# Altium PCB USB_to_UART.PcbDoc
Units mil, origin at the board's own origin, x right, y up, seen from the top; angles counter-clockwise.
Board outline 1500 x 625 mil, 2 copper layers (Top Layer, Bottom Layer), stack 61.8 mil thick; 10 components, 9 nets, 54 pads, 17 vias.
Unrouted connection lines stored in the file: 5.
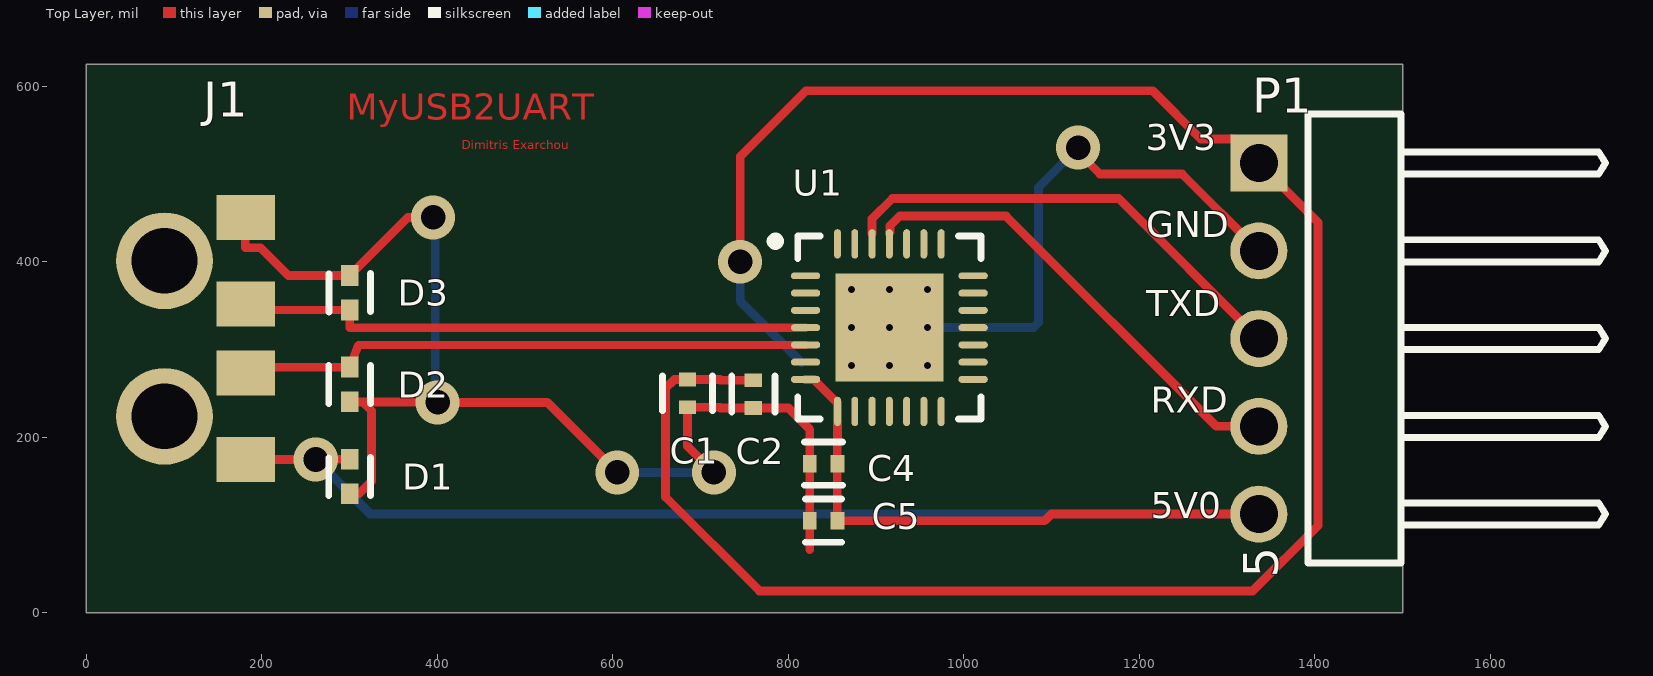
[diagram p0: Top Layer view]
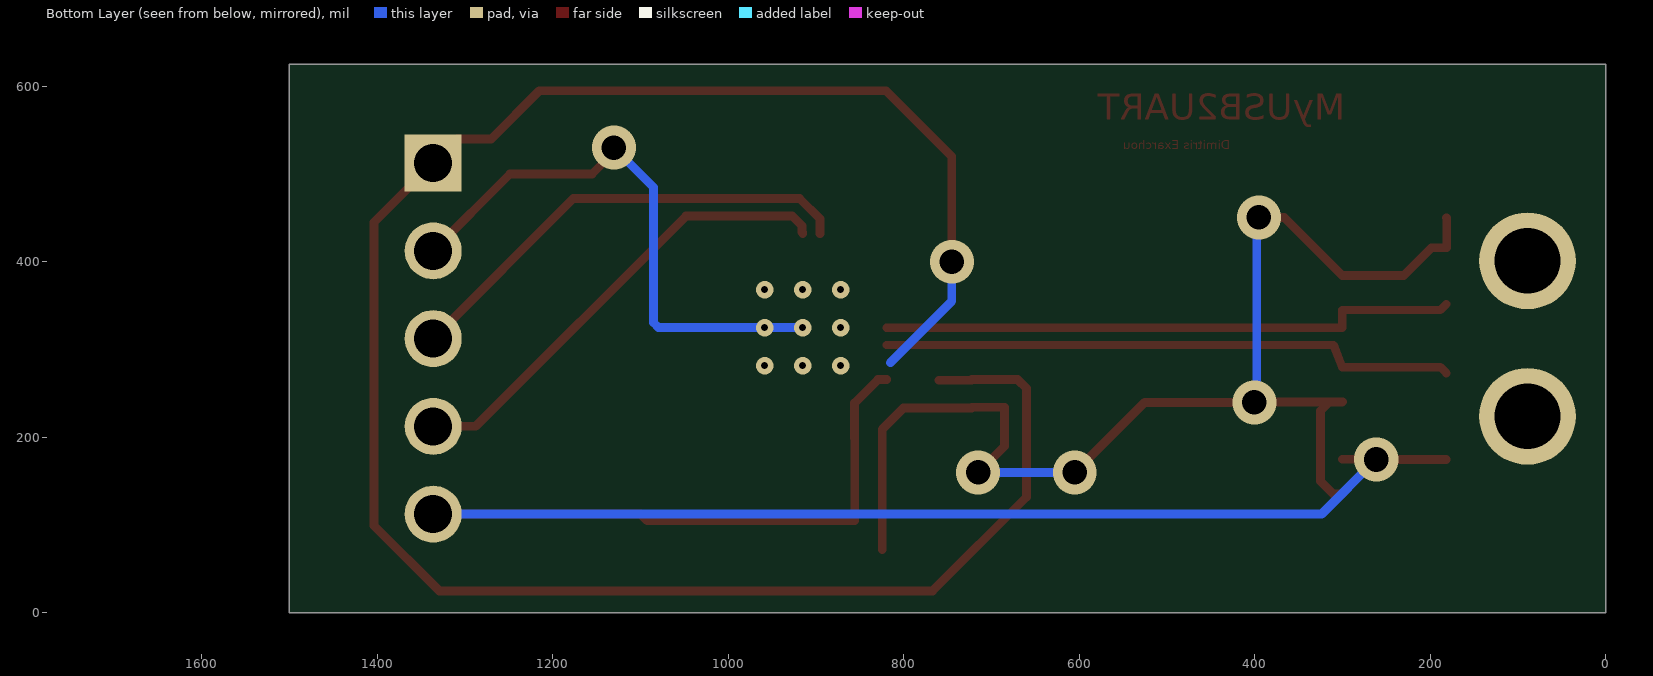
[diagram p1: Bottom Layer view, seen from below]
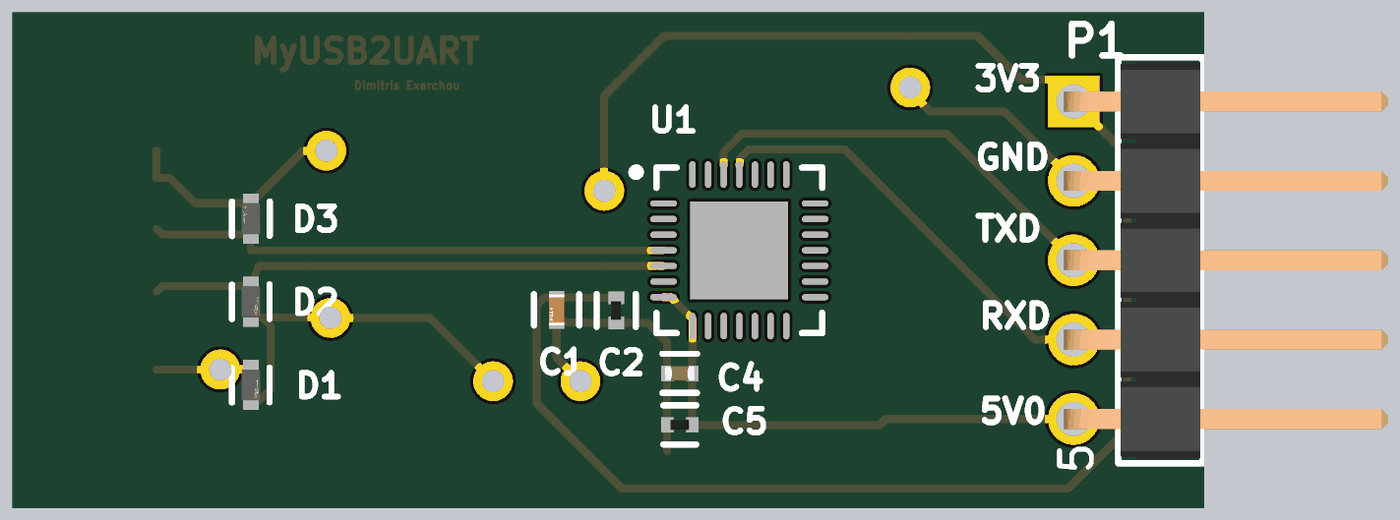
[diagram p2: 3D render of the assembled board from above, using the file's embedded part models]

## Layer stack, top to bottom
Top Solder: solder mask 0.4, Solder Resist, Dk 3.5
Top Layer: signal copper 1.4
Dielectric 1: dielectric 59, FR-4, Dk 4.8
Bottom Layer: signal copper 1.4
Bottom Solder: solder mask 0.4, Solder Resist, Dk 3.5

## Board outline
0,0 0,625 1500,625 1500,0

## Design rules (kind name [scope] priority, off if disabled: settings)
Clearance [All] p1: gap=10 ignorepadtopadclearanceinfootprint=FALSE except(0: Arc-Hole Track-Hole SMDPad-Hole THPad-Hole Via-Hole Fill-Hole Poly-Hole Region-Hole Text-Hole)
DiffPairsRouting [InDifferentialPair('DATA')] p1: maxlimit=5 minlimit=5 mostfreqgap=5 toplayer_minwidth=9.44 toplayer_maxwidth=9.44 toplayer_prefwidth=9.44 bottomlayer_minwidth=9.44 bottomlayer_maxwidth=9.44 bottomlayer_prefwidth=9.44 impedanceprofiledriven=TRUE impedanceprofileid={99593C97-5ADA-46A5-B131-CD178615C1B9} impedanceprofilevalue=90.000000 maxuncoupledlength=500
PolygonConnect [All] p1: connectstyle=Relief reliefconductorwidth=10 reliefentries=4 polygonreliefangle="90 Angle" airgapwidth=10
RoutingVias [All] p1: holewidth=28 width=50 viastyle="Through Hole" minholewidth=28 minwidth=50 maxholewidth=28 maxwidth=50
SolderMaskExpansion [All] p1: expansion=4 istentingtop=FALSE
Width [All] p1: maxlimit=10 minlimit=10 preferedwidth=10
29 further rules are at their usual default settings.

## Classes and differential pairs
component class USB_to_UART: C1 C2 C4 C5 D1 D2 D3 J1 P1
differential pair DATA: +DATA_P -DATA_N

## Components (designator, comment, footprint, x,y, rotation, side; value= is the part's Value field where it differs from the comment)
C1 "C1005X5R1A475K050BC" FP-C1005-050-0_15-MFG 685,250 r270 top
C2 "GRM155R71C104KA88D" FP-GRM15-MFG 760,249.25 r90 top value=0.10μF
C4 "GRM155R61A105KE15D" FP-GRM15-0_1-MFG 840,170 r0 top value=1uF
C5 "GRM155R71C104KA88D" FP-GRM15-MFG 840,105 r180 top value=0.10μF
D1 "TPD1E10B06DPYR" FP-DPY0002A-MFG 300,155.32 r90 top
D2 "TPD1E10B06DPYR" FP-DPY0002A-MFG 300,260.32 r90 top
D3 "TPD1E10B06DPYR" FP-DPY0002A-MFG 300,364.68 r270 top
J1 "629004113921" 629004113921 -220,312.5 r270 top
P1 "61300511021" 61300511021 1445,312.5 r90 top
U1 "CP2102-GM" SLAB-QFN-28-3125x3125TP_N 915,325 r0 top

## Footprints (in the part's own frame and the unit in brackets; to place one, negate y for a bottom-side part, rotate by r counter-clockwise, add the part's x,y. Pads: shape width x height; smd on the part's side, far side on the other; paste and mask are expansions set on the pad)
61300511021 [mm] "Pin Header, pitch 2.54 mm, THT, Angled, single row, 5p"
  rect 1.65x1.65 hole 1.1: 1(5.08,2.77)
  round 1.65 hole 1.1: 2(2.54,2.77) 3(0,2.77) 4(-2.54,2.77) 5(-5.08,2.77)
  silkscreen extent -6.5,-7.27 6.5,1.34, body extent -6.35,-7.27 6.35,3.09, height 2.58
629004113921 [mm] "USB 2.0 Plug Type A SMT with Clip"
  rect 1.3x1.7 smd: 1(3.5,10.2) 2(1,10.2) 3(-1,10.2) 4(-3.5,10.2)
  round 2.8 hole 1.9: ""(-2.25,7.85) ""(2.25,7.85)
  body extent -6,-9.4 6,10.4, height 2.25
FP-C1005-050-0_15-MFG [mm]
  rect 0.4x0.5 smd paste+0 mask+0: 1(-0.4,0) 2(0.4,0)
  silkscreen extent -0.5,-0.73 0.5,0.73, body extent -0.7,-0.43 0.7,0.43, height 0.25
FP-DPY0002A-MFG [mm]
  rect 0.6x0.5 smd paste+0 mask+0: 1(-0.5,0) 2(0.5,0)
  silkscreen extent -0.56,-0.6 0.55,0.6, body extent -0.9,-0.45 0.9,0.45, height 0.25
FP-GRM15-0_1-MFG [mm]
  rect 0.4x0.5 smd paste+0 mask+0: 1(-0.4,0) 2(0.4,0)
  silkscreen extent -0.55,-0.62 0.55,0.62, body extent -0.7,-0.38 0.7,0.38, height 0.25
FP-GRM15-MFG [mm]
  rect 0.4x0.5 smd paste+0 mask+0: 1(-0.4,0) 2(0.4,0)
  silkscreen extent -0.53,-0.62 0.53,0.62, body extent -0.7,-0.38 0.7,0.38, height 0.25
SLAB-QFN-28-3125x3125TP_N [mm] "QFN, 28-Leads, Body 5x5mm, Pitch 0.5mm, Thermal Pad 3.13x3.13mm, IPC Medium Density"
  oval 0.85x0.2 smd: 1(-2.425,1.5) 2(-2.425,1) 3(-2.425,0.5) 4(-2.425,0) 5(-2.425,-0.5) 6(-2.425,-1) 7(-2.425,-1.5) 15(2.425,-1.5) 16(2.425,-1) 17(2.425,-0.5) 18(2.425,0) 19(2.425,0.5) 20(2.425,1) 21(2.425,1.5)
  oval 0.2x0.85 smd: 8(-1.5,-2.425) 9(-1,-2.425) 10(-0.5,-2.425) 11(0,-2.425) 12(0.5,-2.425) 13(1,-2.425) 14(1.5,-2.425) 22(1.5,2.425) 23(1,2.425) 24(0.5,2.425) 25(0,2.425) 26(-0.5,2.425) 27(-1,2.425) 28(-1.5,2.425)
  rect 3.13x3.13 smd: 29(0,0)
  silkscreen extent -3.42,-2.65 2.65,2.65, body extent -2.5,-2.5 2.5,2.5, height 1

## Part data
C1: library part CMP-2000-05997-2, "CAP CER 4.7UF 10V X5R 0402", Capacitance=4.7uF, Case Code (Imperial)=0402, Case Code (Metric)=1005, Dielectric=X5R, Dielectric Material=Ceramic, Max Operating Temperature=85°C, Min Operating Temperature=-55°C, Package Quantity=10000, Tolerance=10%, Voltage Rating=10V, Case/Package=0402, Lead Free="Lead Free", Length=0.039inch, Mount="Surface Mount", Packaging="Cut Tape", REACH SVHC="No SVHC", RoHS Compliant=Yes, Series=C, Thickness=0.022inch, Voltage Rating (DC)=10V, Width=0.02inch
C2 C5: library part CMP-2100-03641-2, "CAP CER 0.1UF 16V X7R 0402", Capacitance=0.10μF, Manufacturer=Murata, Package=GRM15, Temperature="-55°C to +125°C", Temperature Characteristic=X7R, Temperature Range High=+125°C, Temperature Range Low=-55°C, Tolerance=10%, Voltage Rating=16Vdc, Category=Cap, ComponentLink2Description=Datasheet, ComponentLink2URL=https://search.murata.co.jp/Ceramy/image/img/A01X/G101/ENG/GRM155R71H471KA01-01A.pdf, Device Class L1="Passive Components", Device Class L2=Capacitors, Device Class L3="Ceramic Capacitors", Digikey Description="CAP CER 0.1UF 16V X7R 0402", Height=0.55mm, Ipc Land Pattern Name=CAPC10050X219, Lead Free=yes, Manufacturer Part Number=GRM155R71C104KA88D, Material=Ceramic, Mouser Description="0402 0.1 uF 16V ±10 % Tolerance X7R SMT Multilayer Ceramic Capacitor", Octopart=https://octopart.com/grm155r71c104ka88d-murata-196880, RoHS=TRUE, Standoff Height=0mm
C4: library part CMP-2008-04556-2, "CAP CER 1UF 10V X5R 0402", Capacitance=1uF, Manufacturer=Murata, Package=GRM15-0.1, Temperature="-55°C to +85°C", Temperature Characteristic=X5R, Temperature Coefficient=15%, Temperature Range High=+85°C, Temperature Range Low=-55°C, Tolerance=10%, Voltage Rating=10V, Automotive=No, Category=Cap, ComponentLink2Description=Datasheet, ComponentLink2URL=https://search.murata.co.jp/Ceramy/image/img/A01X/G101/ENG/GRM155R61A105KE15-01A.pdf, Device Class L1="Passive Components", Device Class L2=Capacitors, Device Class L3="Ceramic Capacitors", Digikey Description="CAP CER 1UF 10V X5R 0402", Height=0.55mm, Ipc Land Pattern Name=CAPC10050X50, Lead Free=Yes, Manufacturer Part Number=GRM155R61A105KE15D, Material=Ceramic, Mouser Description="0402 1 uF 10 V ±10% Tolerance X5R Surface Mount Multilayer Ceramic Capacitor", Octopart=https://octopart.com/grm155r61a105ke15d-murata-197442, RoHS=TRUE
D1 D2 D3: library part CMP-0326-00004-4, "TVS DIODE 5.5V 14V 2X1SON", Breakdown Voltage=6V, Capacitance=12pF, Case/Package=0402, Clamping Voltage=14V, Leakage Current=100nA, Max Operating Temperature=125°C, Min Operating Temperature=-40°C, Package Quantity=1, Peak Pulse Current=5A, Peak Pulse Power=90W, Power Line Protection=No, Reverse Standoff Voltage=5.5V, Test Current=1mA, Composition=Zener, Contact Plating=Gold, Direction=Bidirectional, Element Configuration=Single, ESD Protection=Yes, Height=0.35mm, Interface=GPIO, Lead Free="Lead Free", Length=1.1mm, Max Reverse Leakage Current=100nA, Min Breakdown Voltage=6V, Number of Bidirectional Channels=1, Number of Channels=1, Number of Pins=2, Packaging="Tape and Reel", Radiation Hardening=No, REACH SVHC="No SVHC", Width=0.7mm, Working Voltage=5.5V
J1: library part CMP-1502-03242-1, "USB 2.0 Type A Plug WR-COM, Horizontal, SMT, with Clips", Contact Resistance=20mOhm, Manufacturer="Wurth Elektronik", Operating Temperature=-40to105degC, Rated Current=1.5A, Working Voltage=30VAC, Connector Type=USB2.0TypeA, Datasheet URL=https://katalog.we-online.de/em/datasheet/629004113921.pdf, Gender=Plug, Manufacturer URL=http://www.we-online.de, Mounting Technology=SMT, Orientation=Horizontal, Package Reference=629004113921, Packaging=Tube, Part Number=629004113921, Publisher=WurthElektronik
P1: library part CMP-1502-01067-1, "THT Angled Pin Header WR-PHD, Pitch 2.54 mm, Single Row, 5 pins", Contact Resistance=20mOhm, Manufacturer="Wurth Elektronik", Operating Temperature=-40to105degC, Rated Current=3A, Withstanding Voltage=500VAC, Working Voltage=250VAC, Datasheet URL=https://katalog.we-online.de/em/datasheet/6130xx11021.pdf, Gender=Male, Manufacturer URL=http://www.we-online.de, Mounting Technology=THT, Orientation=Angled, Package Reference=61300511021, Packaging=Bag, Part Number=61300511021, Pin Number=5, Pitch=2.54mm, Publisher=WurthElektronik, Row Number=Single
U1: library part CMP-0511-00012-1, "Single-Chip USB to UART Bridge, 1024 Bytes EEPROM, -40 to 85 degC, 28-pin QFN, Tube", Manufacturer="Silicon Labs", Code_IPC=J-STD-020C, Code_JEDEC=MO-220, ComponentLink1Description="Manufacturer URL", ComponentLink1URL=http://www.silabs.com/, ComponentLink2Description=Datasheet, ComponentLink2URL=http://www.silabs.com/Support%20Documents/TechnicalDocs/CP2102-9.pdf, ComponentLink3Description="Package Specification", ComponentLink3URL=http://www.silabs.com/Support%20Documents/TechnicalDocs/C8051T61x.pdf, DatasheetVersion="Rev. 1.5", EEPROM="1024 Bytes", Internal Oscillator=TRUE, Mounting Technology="Surface Mount", PackageDescription="28-Pin Quad-Flat No-Leads Package, Body 5 x 5 mm, Pitch 0.5 mm", PackageReference=QFN-28, PartNumber=CP2102-GM, Sub-Family="USB Bridges"

## Via types
v1: diameter 19.68, hole 7.87, Top Layer to Bottom Layer, 9 vias
v2: diameter 50, hole 28, Top Layer to Bottom Layer, 8 vias

## Nets (pads, with @x,y where several pads share a name; then routed paths per layer and width w, separated by ;. In a path a pad name is that pad's centre, name@x,y a point inside that pad or via, vN(x,y) a via of type N, cw(c..) or ccw(c..) an arc to the next point about the centre after c; other vN are vias at no path point)
DATA_N: D2.2 J1.2 U1.5 | length 658
  Top Layer w9.44: J1.2 188.45,280 D2.2 310,305.31 U1.5
DATA_P: D3.2 J1.3 U1.4 | length 660.8
  Top Layer w9.44: J1.3 188.45,345 D3.2 300,325 U1.4
GND: C1.2 C2.1 C4.1 C5.2 D1.1 D2.1 D3.1 J1. J1.4 P1.2 U1.3 U1.29 | length 2097.5
  Top Layer w10: J1.4 181,450.29 181,416 198.37,416 230,384.37 D3.1 366.16,450.53 v2(395.07,450.53) ; D1.1 310.63,135.63 325,150 325,230 314.79,240.21 ; D2.1 300.42,240.21 314.79,240.21 ; v2(605,160) 525.2,239.8 v2(400.29,239.8) 399.87,240.21 314.79,240.21 ; v2(715,160) 685,190 C1.2 722,234.25 722.75,233.5 C2.1 800,233.5 824.25,209.25 C4.1 C5.2 824.25,72.25 ; v2(1130.14,530.17) 1130.14,524.86 1155,500 1248.44,500 P1.2
  Bottom Layer w10: v2(395.07,450.53) 397.68,447.92 397.68,242.41 v2(400.29,239.8) ; v2(605,160) v2(715,160) ; v1(915,325) v1(958.31,325) 1079.14,325 1085,330.86 1085,485.03 v2(1130.14,530.17)
  other v1: 871.69,281.69 915,281.69 958.31,281.69 871.69,325 871.69,368.31 915,368.31 958.31,368.31
NetD4_2: 
NetD5_2: 
NetP1_3: P1.3 U1.26 | length 533.2
  Top Layer w10: U1.26@895.32,432.2 895.32,448.96 918.56,472.2 1176.24,472.2 P1.3
NetP1_4: P1.4 U1.25 | length 533.3
  Top Layer w10: U1.25@915,432.2 915,433.25 915.75,434 915.75,441.11 926.84,452.2 1047.8,452.2 1287.5,212.5 P1.4
VBUS: C4.2 C5.1 D1.2 J1.1 P1.5 U1.7 U1.8 | length 1971.9
  Top Layer w10: J1.1 v2(261.3,174.7) ; v2(261.59,175) D1.2 ; U1.7 829,265.94 855.94,239 U1.8 855.94,199.2 855.75,199 C4.2 C5.1 1092,105 1099.5,112.5 P1.5
  Bottom Layer w10: v2(261.3,174.7) 323.5,112.5 324.09,112.5 ; v2(261.59,175) 324.09,112.5 ; P1.5 324.09,112.5
VDD: C1.1 C2.2 P1.1 U1.6 | length 2408
  Top Layer w10: v2(745,400) 745,520 820,595 1215,595 1270.02,539.98 1308.46,539.98 P1.1 1403.43,445.02 1403.43,99.43 1329,25 767,25 660,132 660,255.75 670,265.75 C1.1 722,265.75 722.75,265 C2.2
  Bottom Layer w10: v2(745,400) 745,355 815,285
pads on no net: U1.1 U1.2 U1.9 U1.10 U1.11 U1.12 U1.13 U1.14 U1.15 U1.16 U1.17 U1.18 U1.19 U1.20 U1.21 U1.22 U1.23 U1.24 U1.27 U1.28

## Other copper
Top Layer:
  text "MyUSB2UART" at 297,562 h30
  text "Dimitris Exarchou" at 428,528 h10

## Silkscreen, mask and mechanical layers (free items; w line width, h text height)
Top Overlay:
  text "3V3" at 1207,527 h30
  text "GND" at 1208,428 h30
  text "TXD" at 1208,338 h30
  text "RXD" at 1213,228 h30
  text "5V0" at 1213,108 h30
Bottom Courtyard:
  the board outline again, w10

## Text inside footprints (layer, text, board x,y; h text height)
J1: Mechanical 2 "PCB Edge" at -40.87,391.24 h24 r270
P1: Top Overlay "5" at 1358.39,40.06 h40 r90